# Altium PCB PCB2.PcbDoc
Units mil, origin at the board's own origin, x right, y up, seen from the top; angles counter-clockwise.
Board outline 6000 x 4000 mil, 2 copper layers (Top Layer, Bottom Layer); 7 components, 6 nets, 52 pads, 0 vias.
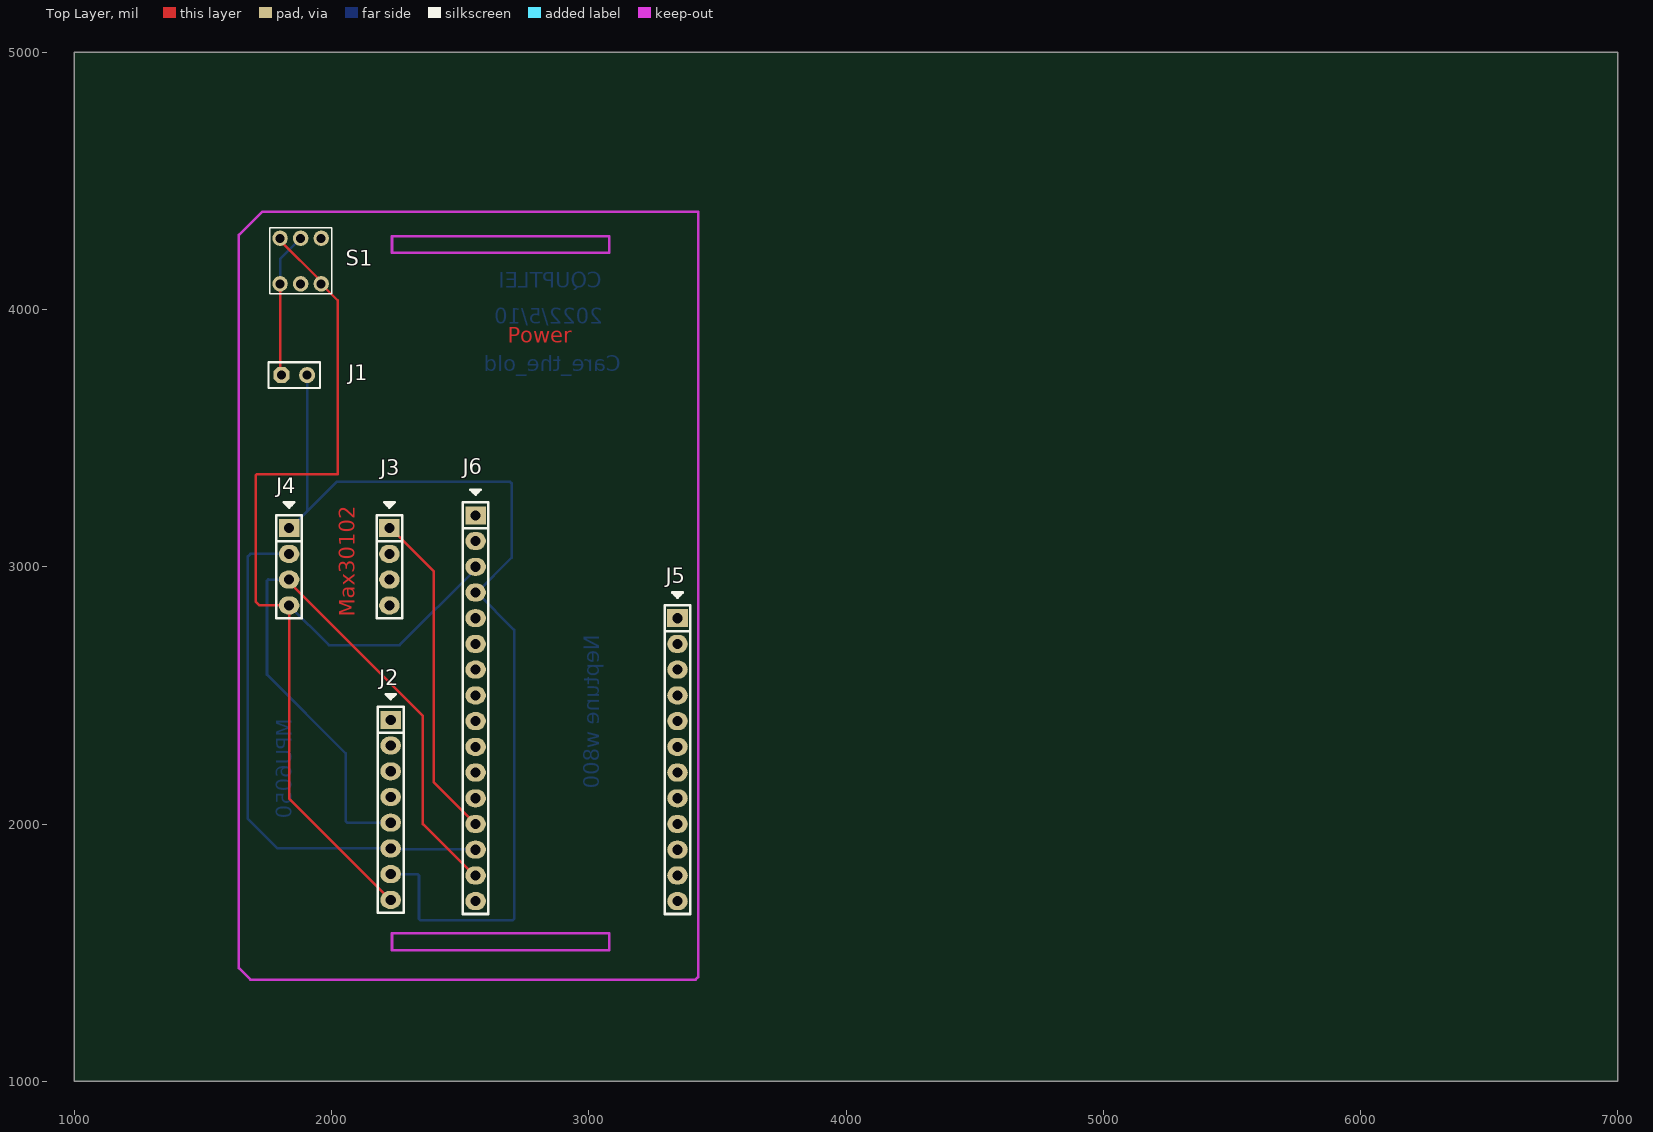
[diagram p0: Top Layer view]
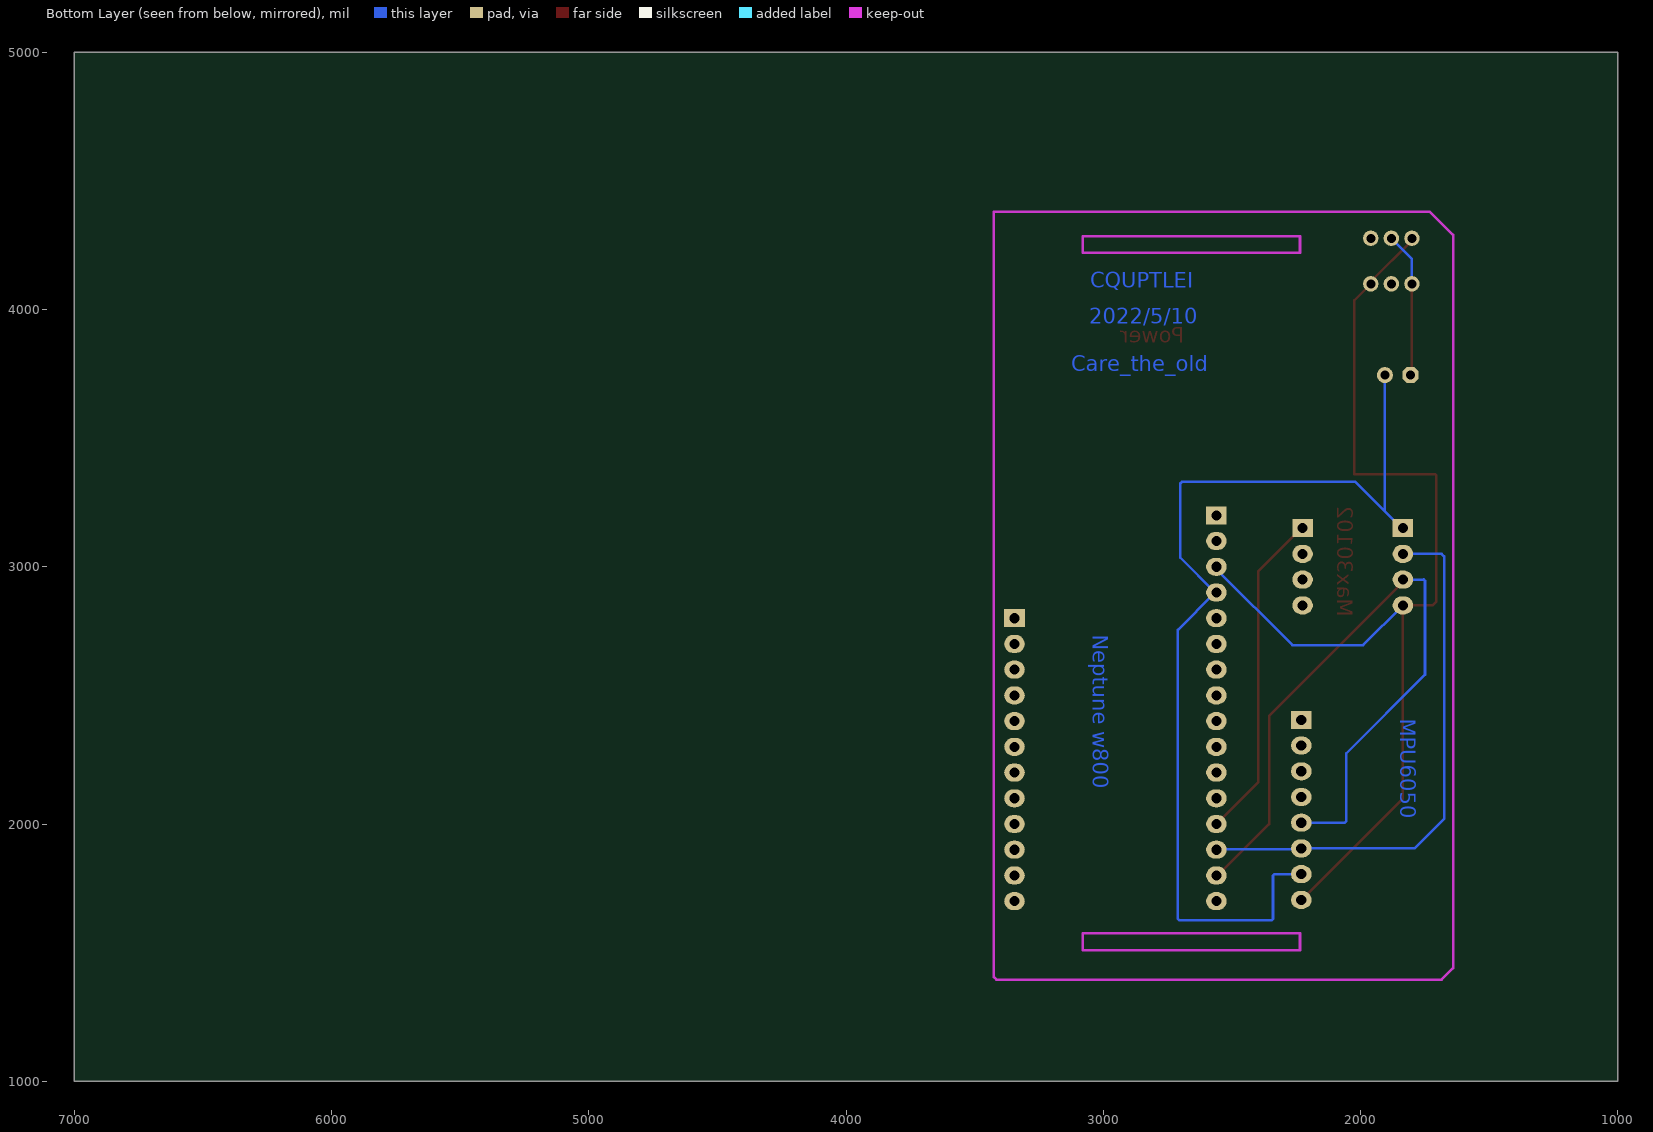
[diagram p1: Bottom Layer view, seen from below]
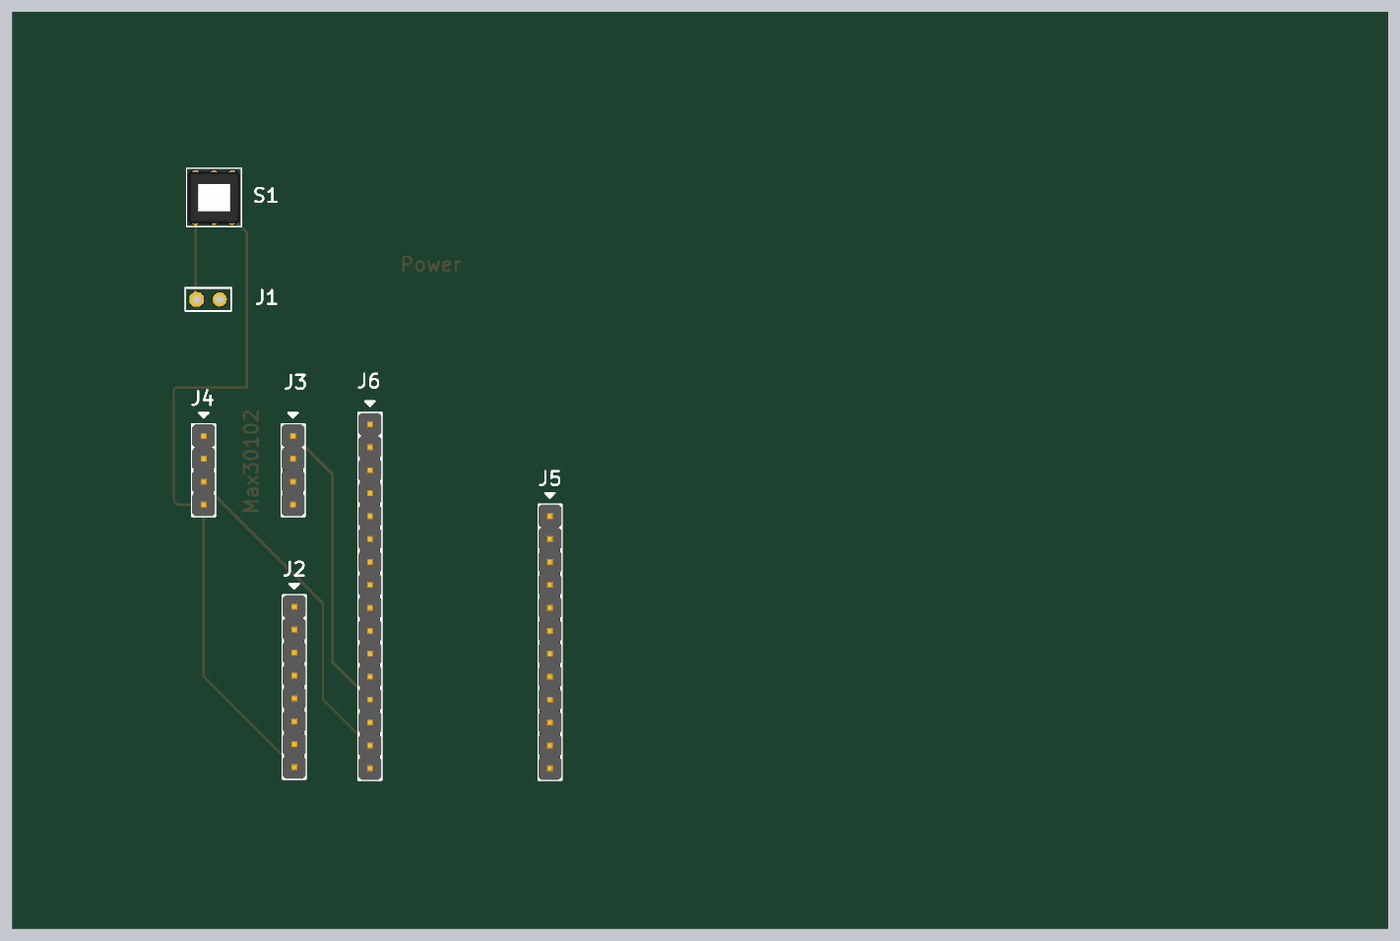
[diagram p2: 3D render of the assembled board from above, using the file's embedded part models]

## Layer stack, top to bottom
Top Solder: solder mask 0.4, Solder Resist, Dk 3.5
Top Layer: signal copper 1.4
Dielectric 1: dielectric 12.6, FR-4, Dk 4.8
Bottom Layer: signal copper 1.4
Bottom Solder: solder mask 0.4, Solder Resist, Dk 3.5

## Board outline
1000,1000 7000,1000 7000,5000 1000,5000

## Design rules (kind name [scope] priority, off if disabled: settings)
Clearance [All] p1: gap=10 ignorepadtopadclearanceinfootprint=FALSE except(0: Arc-Hole Track-Hole SMDPad-Hole THPad-Hole Via-Hole Fill-Hole Poly-Hole Region-Hole Text-Hole)
PolygonConnect [All] p1: connectstyle=Relief reliefconductorwidth=10 reliefentries=4 polygonreliefangle="90 Angle" airgapwidth=10
RoutingVias [All] p1: holewidth=28 width=50 viastyle="Through Hole" minholewidth=28 minwidth=50 maxholewidth=28 maxwidth=50
SolderMaskExpansion [All] p1: expansion=4 istentingtop=FALSE
Width [All] p1: maxlimit=10 minlimit=10 preferedwidth=10
30 further rules are at their usual default settings.

## Components (designator, comment, footprint, x,y, rotation, side; value= is the part's Value field where it differs from the comment)
J1 "CON2" HDR1X2 1805,3745 r0 top
J2 "HDR1x8" PIN-8-2.54-1.0 2230,2055 r270 top
J3 "HDR1x4" PIN-4-2.54-1.0 2225,3000 r270 top
J4 "HDR1x4" PIN-4-2.54-1.0 1835,3000 r270 top
J5 "HDR1x12" PIN-12-2.54-1.0 3345,2250 r270 top
J6 "HDR1x16" PIN-16-2.54-1.0 2560,2450 r270 top
S1 "开关" 六角开关小 1800,4100 r0 top

## Footprints (in the part's own frame and the unit in brackets; to place one, negate y for a bottom-side part, rotate by r counter-clockwise, add the part's x,y. Pads: shape width x height; smd on the part's side, far side on the other; paste and mask are expansions set on the pad)
HDR1X2 [mil]
  oct 62x62 hole 35: 1(0,0)
  round 62 hole 35: 2(100,0)
  silkscreen extent -50,-50 150,50
PIN-4-2.54-1.0 [mil] "Pin Header"
  rect 70x80 hole 39.37: 1(-150,0)
  oval 70x80 hole 39.37: 2(-50,0) 3(50,0) 4(150,0)
  silkscreen extent -250,-50 200,50, body extent -200,-50 200,50, height 398
PIN-8-2.54-1.0 [mil] "Pin Header"
  rect 70x80 hole 39.37: 1(-350,0)
  oval 70x80 hole 39.37: 2(-250,0) 3(-150,0) 4(-50,0) 5(50,0) 6(150,0) 7(250,0) 8(350,0)
  silkscreen extent -450,-50 400,50, body extent -400,-50 400,50, height 398
PIN-12-2.54-1.0 [mil] "Pin Header"
  rect 70x80 hole 39.37: 1(-550,0)
  oval 70x80 hole 39.37: 2(-450,0) 3(-350,0) 4(-250,0) 5(-150,0) 6(-50,0) 7(50,0) 8(150,0) 9(250,0) 10(350,0) 11(450,0) 12(550,0)
  silkscreen extent -650,-50 600,50, body extent -600,-50 600,50, height 398
PIN-16-2.54-1.0 [mil] "Pin Header"
  rect 70x80 hole 39.37: 1(-750,0)
  oval 70x80 hole 39.37: 2(-650,0) 3(-550,0) 4(-450,0) 5(-350,0) 6(-250,0) 7(-150,0) 8(-50,0) 9(50,0) 10(150,0) 11(250,0) 12(350,0) 13(450,0) 14(550,0) 15(650,0) 16(750,0)
  silkscreen extent -850,-50 800,50, body extent -800,-50 800,50, height 398
六角开关小 [mil]
  round 60 hole 35: 1(0,0) 2(80,0) 3(160,0) 4(160,177) 5(80,177) 6(0,177)
  silkscreen extent -40,-38 200,217, body extent -33,-26 195,202, height 404

## Part data
J1 J2 J3 J4 J5 J6: "Connector"
S1: library part 六脚开关

## Nets (pads, with @x,y where several pads share a name; then routed paths per layer and width w, separated by ;. In a path a pad name is that pad's centre, name@x,y a point inside that pad or via, vN(x,y) a via of type N, cw(c..) or ccw(c..) an arc to the next point about the centre after c; other vN are vias at no path point)
GND: J1.2 J2.7 J4.1 J6.4 | length 3941.8
  Bottom Layer w10: J4.1 1840,3150 1905,3215 ; J1.2 1905,3215 ; J2.7 2334.14,1805 2340,1799.14 2340,1630.86 2345.86,1625 2704.14,1625 2710,1630.86 2710,2755 J6.4@2565,2900 ; J6.4 J6.4@2565,2900 ; 1905,3215 2020,3330 2694.14,3330 2700,3324.14 2700,3035 J6.4@2565,2900
NetJ2_5: J2.5 J4.3 J6.15 | length 2785.6
  Top Layer w10: J4.3 1835,2940 2355,2420 2355,2000 2555,1800 J6.15
  Bottom Layer w10: J4.3@1840,2950 J4.3 1755,2950 1754.14,2950.86 1749.14,2945.86 1749.14,2580.86 2055,2275 2055,2010.86 2060.86,2005 J2.5
NetJ2_6: J2.6 J4.2 J6.14 | length 2123.8
  Top Layer w10: J4.2 J4.2@1840,3050
  Bottom Layer w10: J4.2 1685,3050 1675,3040 1675,2020 1790,1905 J2.6 2232.5,1902.5 2557.5,1902.5 J6.14
NetJ2_8: J2.8 J4.4 J6.3 S1.3 S1.6 | length 4187.8
  Top Layer w10: S1.6 1800,4268.5 S1.3@1960,4108.5 ; S1.3 2024.14,4035.86 2024.14,3360 1710.86,3360 1705,3354.14 1705,2865.86 1720.86,2850 J4.4 1835,2100 J2.8 ; J6.3@2555,3000 J6.3
  Bottom Layer w10: J4.4 1990,2695 2265,2695 2560,2990 J6.3 ; J2.8@2225,1705 J2.8
NetJ3_1: J3.1 J6.13 | length 1291.7
  Top Layer w10: J3.1 2230,3150 2397.14,2982.86 2397.14,2162.86 J6.13
VCC: J1.1 S1.1 S1.5 | length 567.2
  Top Layer w10: S1.1 1800,3750 J1.1
  Bottom Layer w10: S1.1 1800,4197 S1.5
pads on no net: J2.1 J2.2 J2.3 J2.4 J3.2 J3.3 J3.4 J5.1 J5.2 J5.3 J5.4 J5.5 J5.6 J5.7 J5.8 J5.9 J5.10 J5.11 J5.12 J6.1 J6.2 J6.5 J6.6 J6.7 J6.8 J6.9 J6.10 J6.11 J6.12 J6.16 S1.2 S1.4

## Keep-outs
Keep-Out Layer:
  lines w10: 1640,1440 1640,4290 1730,4380 3425,4380 3425,1405 3415,1395 1685,1395 1640,1440 ; 2235,1510 3080,1510 3080,1575 2235,1575 2235,1510 ; 2235,4220 3080,4220 3080,4285 2235,4285 2235,4220

## Other copper
Top Layer:
  text "Power" at 2685,3870 h60
  text "Max30102" at 2090,2805 h60 r90
Bottom Layer:
  text "CQUPTLEI" at 3050,4085 h60
  text "2022/5/10" at 3055,3945 h60
  text "Care_the_old" at 3125,3760 h60
  text "Neptune w800" at 3040.01,2735 h60 r90
  text "MPU6050" at 1845,2410 h60 r90